# EAGLE board CT_schematic (EAGLE 7.6.0)

Size 100 x 80 mm. Coordinates in mm from the lower left corner, seen from the top.
Outline: 0,0 100,0 100,80 0,80 0,0
Copper layers (1*16): Top 0.035mm / dielectric 1.5mm / Bottom 0.035mm
Design rules "default": minimum track width 10mil, minimum drill 24mil, track to track 8mil, track to pad 8mil, pad to pad 8mil, via to via 8mil, smd to smd 8mil, copper to edge 40mil, drill to drill 8mil, minimum pad ring 10mil, minimum via ring 8mil, stop-mask expansion 4mil, vias tented up to drill 0mil, thermal gap 10mil

## Footprints (pad centres in the part's own frame; a part is rotated, then mirrored left to right if it is on the bottom)
C0603 = smd 0.8 x 0.8: 1 -0.762,0; 2 0.762,0
C0402 = smd 0.5 x 0.5: 1 -0.508,0; 2 0.508,0
C1210 = smd 1.2 x 2.5: 1 -1.524,0; 2 1.524,0
R0603 = smd 0.8 x 0.8: 1 -0.762,0; 2 0.762,0
C0805 = smd 1.2 x 1.3: 1 -1.016,0; 2 1.016,0
C1206 = smd 1.3 x 1.6: 1 -1.524,0; 2 1.524,0
EXV-9H = smd 3.505 x 1.676: 1 -2.857,0; 2 2.857,0
L0603 = smd 0.8 x 0.8: 1 -0.762,0; 2 0.762,0
DR1040 = smd 1.6 x 3.2: 1 -4.458,0; 2 4.458,0
PJ-037B_PACKAGE = drill 3.7 square: 1 12,0 | drill 3.2 square: 2 6,0
TFBGA216 = smd 0.4 x 0.4: A1 -5.6,5.6; A2 -4.8,5.6; A3 -4,5.6; A4 -3.2,5.6; A5 -2.4,5.6; A6 -1.6,5.6; A7 -0.8,5.6; A8 0,5.6; A9 0.8,5.6; A10 1.6,5.6; A11 2.4,5.6; A12 3.2,5.6; A13 4,5.6; A14 4.8,5.6; A15 5.6,5.6; B1 -5.6,4.8; B2 -4.8,4.8; B3 -4,4.8; B4 -3.2,4.8; B5 -2.4,4.8; B6 -1.6,4.8; B7 -0.8,4.8; B8 0,4.8; B9 0.8,4.8; B10 1.6,4.8; B11 2.4,4.8; B12 3.2,4.8; B13 4,4.8; B14 4.8,4.8; B15 5.6,4.8; C1 -5.6,4; C2 -4.8,4; C3 -4,4; C4 -3.2,4; C5 -2.4,4; C6 -1.6,4; C7 -0.8,4; C8 0,4; C9 0.8,4; C10 1.6,4; C11 2.4,4; C12 3.2,4; C13 4,4; C14 4.8,4; C15 5.6,4; D1 -5.6,3.2; D2 -4.8,3.2; D3 -4,3.2; D4 -3.2,3.2; D5 -2.4,3.2; D6 -1.6,3.2; D7 -0.8,3.2; D8 0,3.2; D9 0.8,3.2; D10 1.6,3.2; D11 2.4,3.2; D12 3.2,3.2; D13 4,3.2; D14 4.8,3.2; D15 5.6,3.2; E1 -5.6,2.4; E2 -4.8,2.4; E3 -4,2.4; E4 -3.2,2.4; E5 -2.4,2.4; E6 -1.6,2.4; E7 -0.8,2.4; E8 0,2.4; E9 0.8,2.4; E10 1.6,2.4; E11 2.4,2.4; E12 3.2,2.4; E13 4,2.4; E14 4.8,2.4; E15 5.6,2.4; F1 -5.6,1.6; F2 -4.8,1.6; F3 -4,1.6; F4 -3.2,1.6; F5 -2.4,1.6; F6 -1.6,1.6; F7 -0.8,1.6; F8 0,1.6; F9 0.8,1.6; F10 1.6,1.6; F11 2.4,1.6; F12 3.2,1.6; F13 4,1.6; F14 4.8,1.6; F15 5.6,1.6; G1 -5.6,0.8; G2 -4.8,0.8; G3 -4,0.8; G4 -3.2,0.8; G5 -2.4,0.8; G6 -1.6,0.8; G10 1.6,0.8; G11 2.4,0.8; G12 3.2,0.8; G13 4,0.8; G14 4.8,0.8; G15 5.6,0.8; H1 -5.6,0; H2 -4.8,0; H3 -4,0; H4 -3.2,0; H5 -2.4,0; H6 -1.6,0; H10 1.6,0; H11 2.4,0; H12 3.2,0; H13 4,0; H14 4.8,0; H15 5.6,0; J1 -5.6,-0.8; J2 -4.8,-0.8; J3 -4,-0.8; J4 -3.2,-0.8; J5 -2.4,-0.8; J6 -1.6,-0.8; J10 1.6,-0.8; J11 2.4,-0.8; J12 3.2,-0.8; J13 4,-0.8; J14 4.8,-0.8; J15 5.6,-0.8; K1 -5.6,-1.6; K2 -4.8,-1.6; K3 -4,-1.6; K4 -3.2,-1.6; K5 -2.4,-1.6; K6 -1.6,-1.6; K7 -0.8,-1.6; K8 0,-1.6; K9 0.8,-1.6; K10 1.6,-1.6; K11 2.4,-1.6; K12 3.2,-1.6; K13 4,-1.6; K14 4.8,-1.6; K15 5.6,-1.6; L1 -5.6,-2.4; L2 -4.8,-2.4; L3 -4,-2.4; L4 -3.2,-2.4; L5 -2.4,-2.4; L6 -1.6,-2.4; L7 -0.8,-2.4; L8 0,-2.4; L9 0.8,-2.4; L10 1.6,-2.4; L11 2.4,-2.4; L12 3.2,-2.4; L13 4,-2.4; L14 4.8,-2.4; L15 5.6,-2.4; M1 -5.6,-3.2; M2 -4.8,-3.2; M3 -4,-3.2; M4 -3.2,-3.2; M5 -2.4,-3.2; M6 -1.6,-3.2; M7 -0.8,-3.2; M8 0,-3.2; M9 0.8,-3.2; M10 1.6,-3.2; M11 2.4,-3.2; M12 3.2,-3.2; M13 4,-3.2; M14 4.8,-3.2; M15 5.6,-3.2; N1 -5.6,-4; N2 -4.8,-4; N3 -4,-4; N4 -3.2,-4; N5 -2.4,-4; N6 -1.6,-4; N7 -0.8,-4; N8 0,-4; N9 0.8,-4; N10 1.6,-4; N11 2.4,-4; N12 3.2,-4; N13 4,-4; N14 4.8,-4; N15 5.6,-4; P1 -5.6,-4.8; P2 -4.8,-4.8; P3 -4,-4.8; P4 -3.2,-4.8; P5 -2.4,-4.8; P6 -1.6,-4.8; P7 -0.8,-4.8; P8 0,-4.8; P9 0.8,-4.8; P10 1.6,-4.8; P11 2.4,-4.8; P12 3.2,-4.8; P13 4,-4.8; P14 4.8,-4.8; P15 5.6,-4.8; R1 -5.6,-5.6; R2 -4.8,-5.6; R3 -4,-5.6; R4 -3.2,-5.6; R5 -2.4,-5.6; R6 -1.6,-5.6; R7 -0.8,-5.6; R8 0,-5.6; R9 0.8,-5.6; R10 1.6,-5.6; R11 2.4,-5.6; R12 3.2,-5.6; R13 4,-5.6; R14 4.8,-5.6; R15 5.6,-5.6
LGA63S127P16X13_2050X1750X150 = smd 0.9 x 0.9: 1 -9.525,-8.05; 2 -8.255,-8.05; 3 -6.985,-8.05; 4 -5.715,-8.05; 5 -4.445,-8.05; 6 -3.175,-8.05; 7 -1.905,-8.05; 8 -0.635,-8.05; 9 0.635,-8.05; 10 1.905,-8.05; 11 3.175,-8.05; 12 4.445,-8.05; 13 5.715,-8.05; 14 6.985,-8.05; 15 8.255,-8.05; 16 9.525,-8.05; 17 9.525,-6.35; 18 9.525,-5.08; 19 9.525,-3.81; 20 9.525,-2.54; 21 9.525,-1.27; 22 9.525,0; 23 9.525,1.27; 24 9.525,2.54; 25 9.525,3.81; 26 9.525,5.08; 27 9.525,6.35; 28 9.525,8.05; 29 8.255,8.05; 30 6.985,8.05; 31 5.715,8.05; 32 4.445,8.05; 33 3.175,8.05; 34 1.905,8.05; 35 0.635,8.05; 36 -0.635,8.05; 37 -1.905,8.05; 38 -3.175,8.05; 39 -4.445,8.05; 40 -5.715,8.05; 41 -6.985,8.05; 42 -8.255,8.05; 43 -9.525,8.05; 44 -9.525,6.35; 45 -9.525,5.08; 46 -9.525,3.81; 47 -9.525,2.54; 48 -9.525,1.27; 49 -9.525,0; 50 -9.525,-1.27; 51 -9.525,-2.54; 52 -9.525,-3.81; 53 -9.525,-5.08; 54 -9.525,-6.35 | smd 2.2 x 2.2: 55 -4.5,-4.5; 56 -1.5,-4.5; 57 1.5,-4.5; 58 -4.5,-1.5; 59 -1.5,-1.5; 60 1.5,-1.5; 61 -4.5,1.5; 62 -1.5,1.5; 63 1.5,1.5
COAXIAL_C = smd 1 x 1: 1 0,-1.5; 2 0,1.5 | smd 1.05 x 2.2: 3 -1.475,0; 4 1.475,0
TST-110-05-T-D-RA = drill 1 pad 1.7 square: 1 0,0 | drill 1 pad 1.7: 2 0,2.54; 3 2.54,0; 4 2.54,2.54; 5 5.08,0; 6 5.08,2.54; 7 7.62,0; 8 7.62,2.54; 9 10.16,0; 10 10.16,2.54; 11 12.7,0; 12 12.7,2.54; 13 15.24,0; 14 15.24,2.54; 15 17.78,0; 16 17.78,2.54; 17 20.32,0; 18 20.32,2.54; 19 22.86,0; 20 22.86,2.54
LBGA-64 = smd 0.559 x 0.559: A1 -3.5,3.5; A2 -2.5,3.5; A3 -1.5,3.5; A4 -0.5,3.5; A5 0.5,3.5; A6 1.5,3.5; A7 2.5,3.5; A8 3.5,3.5; B1 -3.5,2.5; B2 -2.5,2.5; B3 -1.5,2.5; B4 -0.5,2.5; B5 0.5,2.5; B6 1.5,2.5; B7 2.5,2.5; B8 3.5,2.5; C1 -3.5,1.5; C2 -2.5,1.5; C3 -1.5,1.5; C4 -0.5,1.5; C5 0.5,1.5; C6 1.5,1.5; C7 2.5,1.5; C8 3.5,1.5; D1 -3.5,0.5; D2 -2.5,0.5; D3 -1.5,0.5; D4 -0.5,0.5; D5 0.5,0.5; D6 1.5,0.5; D7 2.5,0.5; D8 3.5,0.5; E1 -3.5,-0.5; E2 -2.5,-0.5; E3 -1.5,-0.5; E4 -0.5,-0.5; E5 0.5,-0.5; E6 1.5,-0.5; E7 2.5,-0.5; E8 3.5,-0.5; F1 -3.5,-1.5; F2 -2.5,-1.5; F3 -1.5,-1.5; F4 -0.5,-1.5; F5 0.5,-1.5; F6 1.5,-1.5; F7 2.5,-1.5; F8 3.5,-1.5; G1 -3.5,-2.5; G2 -2.5,-2.5; G3 -1.5,-2.5; G4 -0.5,-2.5; G5 0.5,-2.5; G6 1.5,-2.5; G7 2.5,-2.5; G8 3.5,-2.5; H1 -3.5,-3.5; H2 -2.5,-3.5; H3 -1.5,-3.5; H4 -0.5,-3.5; H5 0.5,-3.5; H6 1.5,-3.5; H7 2.5,-3.5; H8 3.5,-3.5
QFN-32 = smd 0.6 x 0.3: 1 -2.3,1.75; 2 -2.3,1.25; 3 -2.3,0.75; 4 -2.3,0.25; 5 -2.3,-0.25; 6 -2.3,-0.75; 7 -2.3,-1.25; 8 -2.3,-1.75; 17 2.3,-1.75; 18 2.3,-1.25; 19 2.3,-0.75; 20 2.3,-0.25; 21 2.3,0.25; 22 2.3,0.75; 23 2.3,1.25; 24 2.3,1.75 | smd 0.3 x 0.6: 9 -1.75,-2.3; 10 -1.25,-2.3; 11 -0.75,-2.3; 12 -0.25,-2.3; 13 0.25,-2.3; 14 0.75,-2.3; 15 1.25,-2.3; 16 1.75,-2.3; 25 1.75,2.3; 26 1.25,2.3; 27 0.75,2.3; 28 0.25,2.3; 29 -0.25,2.3; 30 -0.75,2.3; 31 -1.25,2.3; 32 -1.75,2.3 | smd 3.2 x 3.2: EXP 0,0
SJ-43515TS-SMT-TR = smd 2.2 x 3: 1 0.6,-7.4; 4 3.4,-7.4 | smd 3 x 3: 2 12.8,-7.4; 5 17,-3 | smd 2 x 3: 3 5.3,0; 6 2.5,0 | drill 1.8: P$7 4.5,-3.69; P$8 11.54,-3.69
WM-64PC = drill 0.6 pad 1: 1 -1,0.95; 2 -1,-0.95
QFN-24 = smd 0.7 x 0.305: 1 -1.815,1.25; 2 -1.815,0.75; 3 -1.815,0.25; 4 -1.815,-0.25; 5 -1.815,-0.73; 6 -1.815,-1.25; 13 1.815,-1.25; 14 1.815,-0.75; 15 1.815,-0.25; 16 1.815,0.25; 17 1.815,0.75; 18 1.815,1.25 | smd 0.305 x 0.7: 7 -1.25,-1.815; 8 -0.75,-1.815; 9 -0.25,-1.815; 10 0.25,-1.815; 11 0.75,-1.815; 12 1.25,-1.815; 19 1.25,1.815; 20 0.75,1.815; 21 0.25,1.815; 22 -0.25,1.815; 23 -0.75,1.815; 24 -1.25,1.815 | smd 2.591 x 2.591: 25 0,0
FCI_10118193-0001LF = smd 0.4 x 1.35: 1 -1.3,2.675; 2 -0.65,2.675; 3 0,2.675; 4 0.65,2.675; 5 1.3,2.675 | smd 1.6 x 1.4: 6 -3.2,2.45; 7 3.2,2.45 | smd 1.9 x 1.9: 8 -1.2,0; 9 1.2,0 | hole 0.5: -3.3,0; 3.3,0
SOT143B = smd 1 x 0.7: 1 -0.75,-1 | smd 0.6 x 0.7: 2 0.95,-1; 3 0.95,1; 4 -0.95,1
ABLS-25.000MHZ-B2F-T = smd 5.6 x 2.8: 1 -3.81,0; 2 5.69,0
ASEK = smd 1.4 x 1: 1 -1.1,-0.8; 2 1.1,-0.8; 3 1.1,0.8; 4 -1.1,0.8
ASFL1 = smd 1.7 x 1.5: 1 -1.27,-1.1; 2 1.27,-1.1; 3 1.27,1.1; 4 -1.27,1.1
WSON-8 = smd 0.3 x 0.6: 1 -0.75,0; 2 0.05,0; 3 0.85,0; 4 1.65,0; 5 1.65,3.8; 6 0.85,3.8; 7 0.05,3.8; 8 -0.75,3.8 | smd 3 x 2.6: PAD 0.45,1.9
HTSSOP14 = smd 1.676 x 0.356: 1 -2.8,1.95; 2 -2.8,1.3; 3 -2.8,0.65; 4 -2.8,0; 5 -2.8,-0.65; 6 -2.8,-1.3; 7 -2.8,-1.95; 8 2.8,-1.95; 9 2.8,-1.3; 10 2.8,-0.65; 11 2.8,0; 12 2.8,0.65; 13 2.8,1.3; 14 2.8,1.95 | smd 3 x 5: 15 0,0 | drill 0.4 pad 0.45: P$1 -0.75,1.5; P$2 0.75,1.5; P$3 -0.75,0; P$4 0.8,0; P$5 -0.75,-1.5; P$6 0.9,-1.5
SON-6 = smd 0.55 x 0.3: 1 -0.355,0.5 | smd 0.52 x 0.3: 2 -0.37,0; 3 -0.37,-0.5; 4 0.37,-0.5; 5 0.37,0; 6 0.37,0.5
SW_4-1437565-2 = smd 1.4 x 2.1: 1 -2.23,4.55; 2 -2.23,-4.55; 3 2.23,4.55; 4 2.23,-4.55
LGM67K-G1J2-24-Z = smd 0.8 x 1.4: A -2,0; C 0,0
NC7SZ125M5X = smd 1.3 x 0.7: 1 -1.3,0.95; 2 -1.3,0; 3 -1.3,-0.95; 4 1.3,-0.95; 5 1.3,0.95

## Placement (x,y rotation side)
C1  1e-06  [C0603]  -22.86,88.9 0 top  (outside the outline)
C2  1e-07  [C0603]  -26.67,88.9 0 top  (outside the outline)
C3  1e-07  [C0603]  -30.48,88.9 0 top  (outside the outline)
C4  1e-07  [C0603]  -34.29,88.9 0 top  (outside the outline)
C5  1e-07  [C0603]  -38.1,88.9 0 top  (outside the outline)
C6  1e-07  [C0603]  -41.91,88.9 0 top  (outside the outline)
C7  1e-07  [C0603]  -45.72,88.9 0 top  (outside the outline)
C8  1e-07  [C0603]  -49.53,88.9 0 top  (outside the outline)
C9  1e-07  [C0603]  -53.34,88.9 0 top  (outside the outline)
C10  1e-07  [C0603]  -57.15,88.9 0 top  (outside the outline)
C11  1e-07  [C0603]  -60.96,88.9 0 top  (outside the outline)
C12  1e-07  [C0603]  -64.77,88.9 0 top  (outside the outline)
C13  1e-07  [C0603]  -68.58,88.9 0 top  (outside the outline)
C14  1e-07  [C0603]  -72.39,88.9 0 top  (outside the outline)
C15  1e-07  [C0603]  -76.2,88.9 0 top  (outside the outline)
C16  1e-07  [C0603]  -80.01,88.9 0 top  (outside the outline)
C17  1e-07  [C0603]  -83.82,88.9 0 top  (outside the outline)
C18  1e-07  [C0603]  -87.63,88.9 0 top  (outside the outline)
C19  1e-07  [C0603]  -91.44,88.9 0 top  (outside the outline)
C20  1e-07  [C0603]  -95.25,88.9 0 top  (outside the outline)
C21  1e-07  [C0603]  -15.24,93.98 0 top  (outside the outline)
C22  4.7e-06  [C0603]  -90.17,83.82 0 top  (outside the outline)
C23  1e-07  [C0603]  -19.05,93.98 0 top  (outside the outline)
C24  1e-08  [C0603]  -22.86,93.98 0 top  (outside the outline)
C25  1e-06  [C0603]  -26.67,93.98 0 top  (outside the outline)
C26  1e-07  [C0603]  -30.48,93.98 0 top  (outside the outline)
C27  2.2e-06  [C0603]  -93.98,83.82 0 top  (outside the outline)
C28  2.2e-06  [C0603]  -15.24,88.9 0 top  (outside the outline)
C29  1e-11  [C0402]  -50.8,99.06 0 top  (outside the outline)
C30  1e-11  [C0402]  -54.61,99.06 0 top  (outside the outline)
C31  1e-12  [C0402]  -58.42,99.06 0 top  (outside the outline)
C32  2.2e-05  [C1210]  -66.04,69.85 0 top  (outside the outline)
C33  1e-07  [C0402]  -62.23,99.06 0 top  (outside the outline)
C34  1e-07  [C0402]  -66.04,99.06 0 top  (outside the outline)
C35  1e-07  [C0402]  -69.85,99.06 0 top  (outside the outline)
C36  1e-07  [C0402]  -73.66,99.06 0 top  (outside the outline)
C37  1e-08  [C0402]  -77.47,99.06 0 top  (outside the outline)
C38  1e-08  [C0402]  -81.28,99.06 0 top  (outside the outline)
C39  1e-06  [C0603]  -34.29,93.98 0 top  (outside the outline)
C40  1e-06  [C0603]  -38.1,93.98 0 top  (outside the outline)
C41  1e-06  [C0603]  -41.91,93.98 0 top  (outside the outline)
C42  1e-06  [C0603]  -45.72,93.98 0 top  (outside the outline)
C43  1e-06  [C0603]  -49.53,93.98 0 top  (outside the outline)
C44  1e-06  [C0603]  -53.34,93.98 0 top  (outside the outline)
C45  1e-06  [C0603]  -57.15,93.98 0 top  (outside the outline)
C46  1e-07  [C0402]  -85.09,99.06 0 top  (outside the outline)
C47  1e-07  [C0402]  -88.9,99.06 0 top  (outside the outline)
C48  1e-07  [C0402]  -92.71,99.06 0 top  (outside the outline)
C49  1e-07  [C0402]  -96.52,99.06 0 top  (outside the outline)
C50  1e-06  [C0603]  -60.96,93.98 0 top  (outside the outline)
C51  1e-08  [C0402]  -15.24,104.14 0 top  (outside the outline)
C52  2.2e-06  [C0603]  -19.05,88.9 0 top  (outside the outline)
C53  1e-08  [C0402]  -19.05,104.14 0 top  (outside the outline)
C54  1e-08  [C0402]  -22.86,104.14 0 top  (outside the outline)
C55  1e-06  [C0603]  -64.77,93.98 0 top  (outside the outline)
C56  1e-08  [C0402]  -26.67,104.14 0 top  (outside the outline)
C57  1e-08  [C0402]  -30.48,104.14 0 top  (outside the outline)
C58  1e-08  [C0402]  -34.29,104.14 0 top  (outside the outline)
C59  8e-07  [R0603]  -68.58,93.98 0 top  (outside the outline)
C60  1e-05  [C0805]  -46.99,77.47 0 top  (outside the outline)
C61  1e-06  [C0603]  -72.39,93.98 0 top  (outside the outline)
C62  3.3e-09  [C0402]  -43.18,99.06 0 top  (outside the outline)
C63  1e-07  [C0402]  -38.1,104.14 0 top  (outside the outline)
C64  2.2e-05  [C1210]  -72.39,69.85 0 top  (outside the outline)
C65  2.2e-05  [C1210]  -78.74,69.85 0 top  (outside the outline)
C66  1e-05  [C1206]  -85.09,69.85 0 top  (outside the outline)
C67  1e-05  [C1206]  -91.44,69.85 0 top  (outside the outline)
C68  1e-07  [C0402]  -41.91,104.14 0 top  (outside the outline)
C69  0.0001  [EXV-9H]  -74.93,62.23 0 top  (outside the outline)
C70  0.0001  [EXV-9H]  -86.36,62.23 0 top  (outside the outline)
C71  1e-08  [C0402]  -45.72,104.14 0 top  (outside the outline)
C72  1e-08  [C0402]  -49.53,104.14 0 top  (outside the outline)
C73  1e-08  [C0402]  -53.34,104.14 0 top  (outside the outline)
C74  1e-08  [C0402]  -57.15,104.14 0 top  (outside the outline)
C75  1e-08  [C0402]  -60.96,104.14 0 top  (outside the outline)
F1  240.0  [L0603]  -76.2,93.98 0 top  (outside the outline)
I1  3.6e-09  [C0402]  -46.99,99.06 0 top  (outside the outline)
I2  5.2e-06  [DR1040]  -38.1,41.91 0 top  (outside the outline)
J1  PJ-037B  [PJ-037B_PACKAGE]  -83.82,29.21 0 top  (outside the outline)
R2  1000.0  [R0603]  -80.01,93.98 0 top  (outside the outline)
R7  4700.0  [R0603]  -83.82,93.98 0 top  (outside the outline)
R8  4700.0  [R0603]  -87.63,93.98 0 top  (outside the outline)
R9  4700.0  [R0603]  -91.44,93.98 0 top  (outside the outline)
R10  4700.0  [R0603]  -95.25,93.98 0 top  (outside the outline)
R11  2200.0  [R0603]  -15.24,99.06 0 top  (outside the outline)
R13  2200.0  [R0603]  -19.05,99.06 0 top  (outside the outline)
R15  10000.0  [R0603]  -86.36,77.47 0 top  (outside the outline)
R16  10000.0  [R0603]  -91.44,77.47 0 top  (outside the outline)
R17  10000.0  [R0603]  -96.52,77.47 0 top  (outside the outline)
R18  100000.0  [R0603]  -60.96,77.47 0 top  (outside the outline)
R19  2700.0  [R0603]  -22.86,99.06 0 top  (outside the outline)
R20  10000.0  [R0603]  -15.24,83.82 0 top  (outside the outline)
R21  10000.0  [R0603]  -20.32,83.82 0 top  (outside the outline)
R22  10000.0  [R0603]  -25.4,83.82 0 top  (outside the outline)
R23  10000.0  [R0603]  -30.48,83.82 0 top  (outside the outline)
R24  10000.0  [R0603]  -35.56,83.82 0 top  (outside the outline)
R25  10000.0  [R0603]  -40.64,83.82 0 top  (outside the outline)
R26  10000.0  [R0603]  -45.72,83.82 0 top  (outside the outline)
R27  10000.0  [R0603]  -50.8,83.82 0 top  (outside the outline)
R28  10000.0  [R0603]  -55.88,83.82 0 top  (outside the outline)
R29  10000.0  [R0603]  -60.96,83.82 0 top  (outside the outline)
R30  10000.0  [R0603]  -66.04,83.82 0 top  (outside the outline)
R31  1270.0  [R0603]  -26.67,99.06 0 top  (outside the outline)
R32  1270.0  [R0603]  -30.48,99.06 0 top  (outside the outline)
R33  8060.0  [R0603]  -34.29,99.06 0 top  (outside the outline)
R34  100000.0  [R0603]  -66.04,77.47 0 top  (outside the outline)
R35  36000.0  [R0603]  -71.12,83.82 0 top  (outside the outline)
R36  100000.0  [R0603]  -71.12,77.47 0 top  (outside the outline)
R37  71007.101651032  [R0603]  -55.88,77.47 0 top  (outside the outline)
R38  22000.0  [R0603]  -76.2,83.82 0 top  (outside the outline)
R39  10000.0  [R0603]  -81.28,83.82 0 top  (outside the outline)
R40  10000.0  [R0603]  -86.36,83.82 0 top  (outside the outline)
R41  9100.0  [R0603]  -38.1,99.06 0 top  (outside the outline)
R42  680000.0  [R0603]  -76.2,77.47 0 top  (outside the outline)
R43  120000.0  [R0603]  -81.28,77.47 0 top  (outside the outline)
U1  STM32F779NIH6  [TFBGA216]  -49.53,8.89 0 top  (outside the outline)
U2  CC3200MODR1M2AMOBT  [LGA63S127P16X13_2050X1750X150]  -25.4,11.43 0 top  (outside the outline)
U3  73412-0114  [COAXIAL_C]  -67.31,53.34 0 top  (outside the outline)
U4  TST-110-05-T-D-RA  [TST-110-05-T-D-RA]  -46.99,60.96 0 top  (outside the outline)
U5  MT28EW128ABA1HPC-0SIT  [LBGA-64]  -62.23,7.62 0 top  (outside the outline)
U6  SGTL5000XNAA3  [QFN-32]  -64.77,41.91 0 top  (outside the outline)
U7  SJ-43515TS-SMT-TR  [SJ-43515TS-SMT-TR]  -96.52,10.16 0 top  (outside the outline)
U8  SJ-43515TS-SMT-TR  [SJ-43515TS-SMT-TR]  -39.37,31.75 0 top  (outside the outline)
U9  SJ-43515TS-SMT-TR  [SJ-43515TS-SMT-TR]  -67.31,31.75 0 top  (outside the outline)
U10  WM-64PCT  [WM-64PC]  -50.8,41.91 0 top  (outside the outline)
U11  USB3317C-CP-TR  [QFN-24]  -58.42,71.12 0 top  (outside the outline)
U12  10118193-0001LF  [FCI_10118193-0001LF]  -53.34,53.34 0 top  (outside the outline)
U13  prtr5v0u2ax  [SOT143B]  -73.66,104.14 0 top  (outside the outline)
U14  ABLS-25.000MHZ-B2F-T  [ABLS-25.000MHZ-B2F-T]  -26.67,71.12 0 top  (outside the outline)
U15  ASEK-32.768KHz-ECST  [ASEK]  -66.04,62.23 0 top  (outside the outline)
U16  ASFL-24.57MHZ-NCS  [ASFL1]  -27.94,53.34 0 top  (outside the outline)
U17  ASFL1-26MHZ-NCS  [ASFL1]  -44.45,53.34 0 top  (outside the outline)
U18  LP2951ACSDX/NOPB  [WSON-8]  -85.09,39.37 0 top  (outside the outline)
U19  tps54325PWP  [HTSSOP14]  -38.1,69.85 0 top  (outside the outline)
U20  TPS3895ADRYR  [SON-6]  -77.47,102.87 0 top  (outside the outline)
U21  4-1437565-2  [SW_4-1437565-2]  -27.94,43.18 0 top  (outside the outline)
U22  Q65110A2395  [LGM67K-G1J2-24-Z]  -46.99,71.12 0 top  (outside the outline)
U23  nc7sz125m5x  [NC7SZ125M5X]  -15.24,77.47 0 top  (outside the outline)
U24  nc7sz125m5x  [NC7SZ125M5X]  -21.59,77.47 0 top  (outside the outline)
U25  nc7sz125m5x  [NC7SZ125M5X]  -27.94,77.47 0 top  (outside the outline)
U26  nc7sz125m5x  [NC7SZ125M5X]  -34.29,77.47 0 top  (outside the outline)
U27  nc7sz125m5x  [NC7SZ125M5X]  -40.64,77.47 0 top  (outside the outline)

## Library data of the parts
C1-C75 F1 I1 I2 J1 R2 R7-R11 R13 R15-R43 U1-U27 = circuit_tree

## Nets
CLK_CRYSTAL_U1_G1: C29.1 U1.G1 U14.1
CLK_CRYSTAL_U1_H1: C30.1 U1.H1 U14.2
CLK_U1_E1: U1.E1 U15.3
CLK_U6_21: U6.21 U16.3
CLK_U11_23: U11.23 U17.3
GND: C1.2 C2.2 C3.2 C4.2 C5.2 C6.2 C7.2 C8.2 C9.2 C10.2 C11.2 C12.2 C13.2 C14.2 C15.2 C16.2 C17.2 C18.2 C19.2 C20.2 C21.2 C22.2 C23.2 C24.2 C25.2 C26.2 C27.2 C28.2 C29.2 C30.2 C31.2 C32.2 C33.2 C34.2 C35.2 C36.2 C37.2 C38.2 C46.2 C47.2 C48.2 C49.2 C50.2 C51.2 C52.2 C53.2 C54.2 C55.2 C56.2 C57.2 C58.2 C59.2 C60.2 C61.2 C62.2 C64.2 C65.2 C66.2 C67.2 C68.2 C69.2 C70.2 C71.2 C72.2 C73.2 C74.2 C75.2 J1.2 R2.2 R15.2 R17.2 R18.2 R19.2 R25.2 R32.2 R33.2 R36.2 R38.2 R41.2 R43.2 U1.F2 U1.F6 U1.F7 U1.F8 U1.F9 U1.F10 U1.G6 U1.G10 U1.G12 U1.H6 U1.H10 U1.J6 U1.J10 U1.K6 U1.K7 U1.K8 U1.K9 U1.K10 U1.L6 U1.M1 U1.N1 U2.1 U2.2 U2.16 U2.27 U2.28 U2.30 U2.32 U2.38 U2.43 U2.55 U2.56 U2.57 U2.58 U2.59 U2.60 U2.61 U2.62 U2.63 U3.1 U3.2 U3.3 U3.4 U4.4 U4.6 U4.8 U4.10 U4.12 U4.14 U4.16 U4.18 U4.20 U5.E8 U5.H2 U5.H7 U6.1 U6.3 U6.7 U6.EXP U8.1 U9.1 U10.2 U11.25 U12.5 U12.6 U12.7 U12.8 U12.9 U13.1 U15.2 U16.2 U17.2 U18.3 U18.4 U18.PAD U19.5 U19.8 U19.9 U19.15 U20.2 U22.C U23.2 U23.3 U24.1 U24.3 U25.1 U25.3 U26.1 U26.3 U27.1 U27.3
NET_U1_A7: R11.1 U1.A7 U2.3
NET_U1_B4: R13.1 U1.B4 U2.4
NET_U1_E5: R16.1 U1.E5
NET_U1_E6: R15.1 U1.E6
NET_U1_E11: C28.1 U1.E11
NET_U1_G13: U1.G13
NET_U1_J1: R9.1 U1.J1 U26.4
NET_U1_K12: U1.K12
NET_U1_L5: R17.1 U1.L5
NET_U1_L11: C27.1 U1.L11
NET_U1_R1: C24.1 C25.1 F1.1 U1.P1 U1.R1
NET_U1_R14: U22.A
NET_U1_R15: U21.3 U21.4
NET_U2_21: R18.1 U2.21
NET_U2_23: R19.1 U2.23
NET_U2_35: R8.1 U2.35 U25.4
NET_U3_1: C31.1 I1.1 U3.1
NET_U3_31: I1.2
NET_U4_19: R25.1 U4.19
NET_U5_B4: R29.1 U5.B4
NET_U5_B5: R7.1 U5.B5 U24.4
NET_U6_10: C49.1 U6.10
NET_U6_29: R31.1 U6.29
NET_U6_31: R32.1 U6.31
NET_U7_1: U6.4 U7.1
NET_U7_2: U6.2 U7.2
NET_U7_5: U6.6 U7.5
NET_U8_2: C40.1 U8.2
NET_U8_5: C39.1 U8.5
NET_U8_11: C40.2
NET_U8_12: C39.2
NET_U9_2: C42.1 C43.1 U9.2
NET_U9_5: C41.1 U9.5
NET_U9_13: C42.2 C43.2
NET_U9_14: C41.2
NET_U10_1: C44.1 C45.1 C50.1 U6.16 U10.1
NET_U10_15: C44.2 C45.2
NET_U11_4: C52.1 U11.4
NET_U11_22: R10.1 U11.22 U27.4
NET_U11_24: R33.1 U11.24
NET_U12_1: C55.1 U11.2 U12.1 U13.4
NET_U12_2: U11.5 U12.2 U13.3
NET_U12_3: U11.6 U12.3 U13.2
NET_U18_5: R34.1 U18.5
NET_U18_7: R35.2 R36.1 U18.7
NET_U19_2: R37.2 R38.1 U19.2
NET_U19_3: C61.1 U19.3
NET_U19_4: C62.1 U19.4
NET_U19_10: C63.1 I2.1 U19.10 U19.11
NET_U19_12: C63.2 U19.12
NET_U20_1: R40.1 R41.1 U20.1
NET_U20_3: R42.2 R43.1 U20.3
NET_U20_4: R39.1 U20.4 U23.4 U24.2 U25.2 U26.2 U27.2
NET_U21_1: R2.1 U21.1 U21.2
PROC_FMC_A0: U1.D2 U5.E2
PROC_FMC_A1: U1.E2 U5.D2
PROC_FMC_A2: U1.G2 U5.C2
PROC_FMC_A3: U1.H2 U5.A2
PROC_FMC_A4: U1.J2 U5.B2
PROC_FMC_A5: U1.K3 U5.D3
PROC_FMC_A6: U1.M6 U5.C3
PROC_FMC_A7: U1.N6 U5.A3
PROC_FMC_A8: U1.P6 U5.B6
PROC_FMC_A9: U1.M8 U5.A6
PROC_FMC_A10: U1.N7 U5.C6
PROC_FMC_A11: U1.M7 U5.D6
PROC_FMC_A12: U1.M13 U5.B7
PROC_FMC_A13: U1.M12 U5.A7
PROC_FMC_A14: U1.N12 U5.C7
PROC_FMC_A15: U1.N11 U5.D7
PROC_FMC_A16: U1.N10 U5.E7
PROC_FMC_A17: U1.M10 U5.B3
PROC_FMC_A18: U1.M11 U5.C4
PROC_FMC_A19: U1.A2 U5.D5
PROC_FMC_A20: U1.A1 U5.D4
PROC_FMC_A21: U1.B1 U5.C5
PROC_FMC_A22: U1.B2 U5.B8
PROC_FMC_D0: U1.L12 U5.E3
PROC_FMC_D1: U1.K13 U5.H3
PROC_FMC_D2: U1.B12 U5.E4
PROC_FMC_D3: U1.C12 U5.H4
PROC_FMC_D4: U1.R8 U5.H5
PROC_FMC_D5: U1.N9 U5.E5
PROC_FMC_D6: U1.P9 U5.H6
PROC_FMC_D7: U1.R9 U5.E6
PROC_FMC_D8: U1.P10 U5.F3
PROC_FMC_D9: U1.R10 U5.G3
PROC_FMC_D10: U1.R12 U5.F4
PROC_FMC_D11: U1.P11 U5.G4
PROC_FMC_D12: U1.R11 U5.F5
PROC_FMC_D13: U1.L15 U5.G6
PROC_FMC_D14: U1.L14 U5.F6
PROC_FMC_D15: U1.K15 U5.G7
PROC_FMC_NBL0: R30.1 U1.A6 U5.F7
PROC_FMC_NE2: R26.1 U1.D9 U5.F2
PROC_FMC_NOE: R27.1 U1.D11 U5.G2
PROC_FMC_NWAIT: U1.B11 U5.A4
PROC_FMC_NWE: R28.1 U1.C10 U5.A5
PROC_I2S1_CK: U1.B8 U6.24
PROC_I2S1_SD: U1.A11 U6.26
PROC_I2S1_WS: U1.C8 U6.23
PROC_SYS_JTCK_SWCLK: R23.1 U1.A14 U4.9
PROC_SYS_JTDI: R21.1 U1.A13 U4.5
PROC_SYS_JTDO_SWO: U1.A10 U4.13
PROC_SYS_JTMS_SWDIO: R22.1 U1.A15 U4.7
PROC_SYS_JTRST: R20.1 U1.A9 U4.3
PROC_USB_OTG_HS_ULPI_CK: U1.P4 U11.12
PROC_USB_OTG_HS_ULPI_D0: U1.R2 U11.16
PROC_USB_OTG_HS_ULPI_D1: U1.R5 U11.15
PROC_USB_OTG_HS_ULPI_D2: U1.R4 U11.14
PROC_USB_OTG_HS_ULPI_D3: U1.P12 U11.13
PROC_USB_OTG_HS_ULPI_D4: U1.R13 U11.11
PROC_USB_OTG_HS_ULPI_D5: U1.L13 U11.10
PROC_USB_OTG_HS_ULPI_D6: U1.K14 U11.9
PROC_USB_OTG_HS_ULPI_D7: U1.A8 U11.8
PROC_USB_OTG_HS_ULPI_DIR: U1.F3 U11.19
PROC_USB_OTG_HS_ULPI_NXT: U1.H4 U11.18
PROC_USB_OTG_HS_ULPI_STP: U1.M2 U11.20
RST_OUT_U4_SRESET_B: R24.1 U4.15 U23.1
VCC_S1_12V5: C59.1 C66.1 C67.1 C69.1 C70.1 J1.1 U18.8 U19.7 U19.13 U19.14
VCC_TIER1_1V8: C46.1 C47.1 C54.1 C60.1 C71.1 C72.1 C73.1 C74.1 C75.1 R34.2 R35.1 U6.5 U6.30 U11.21 U18.1 U23.5 U24.5 U25.5 U26.5 U27.5
VCC_TIER1_3V3: C1.1 C2.1 C3.1 C4.1 C5.1 C6.1 C7.1 C8.1 C9.1 C10.1 C11.1 C12.1 C13.1 C14.1 C15.1 C16.1 C17.1 C18.1 C19.1 C20.1 C21.1 C22.1 C23.1 C26.1 C32.1 C33.1 C34.1 C35.1 C36.1 C37.1 C38.1 C48.1 C51.1 C53.1 C56.1 C57.1 C58.1 C64.1 C65.1 C68.1 F1.2 I2.2 R7.2 R8.2 R9.2 R10.2 R11.2 R13.2 R16.2 R20.2 R21.2 R22.2 R23.2 R24.2 R26.2 R27.2 R28.2 R29.2 R30.2 R31.2 R37.1 R39.2 R40.2 R42.1 U1.C1 U1.E7 U1.E8 U1.E9 U1.E10 U1.F4 U1.F5 U1.F11 U1.G5 U1.G11 U1.H5 U1.H11 U1.J5 U1.J11 U1.K5 U1.K11 U1.L7 U1.L8 U1.L9 U1.L10 U2.36 U2.37 U2.40 U4.1 U4.2 U5.D8 U5.F1 U5.G5 U6.20 U11.3 U11.17 U15.4 U16.4 U17.4 U19.1 U20.6

## Tracks (layer width: path | path; a pad name or v marks a point on that pad's centre or on a via)
CLK_CRYSTAL_U1_G1  (2 unrouted)
CLK_CRYSTAL_U1_H1  (2 unrouted)
CLK_U1_E1  (1 unrouted)
CLK_U6_21  (1 unrouted)
CLK_U11_23  (1 unrouted)
GND  (170 unrouted)
NET_U1_A7  (2 unrouted)
NET_U1_B4  (2 unrouted)
NET_U1_E5  (1 unrouted)
NET_U1_E6  (1 unrouted)
NET_U1_E11  (1 unrouted)
NET_U1_J1  (2 unrouted)
NET_U1_L5  (1 unrouted)
NET_U1_L11  (1 unrouted)
NET_U1_R1  (4 unrouted)
NET_U1_R15  (1 unrouted)
NET_U2_21  (1 unrouted)
NET_U2_23  (1 unrouted)
NET_U2_35  (2 unrouted)
NET_U3_1  (2 unrouted)
NET_U4_19  (1 unrouted)
NET_U5_B4  (1 unrouted)
NET_U5_B5  (2 unrouted)
NET_U6_10  (1 unrouted)
NET_U6_29  (1 unrouted)
NET_U6_31  (1 unrouted)
NET_U7_1  (1 unrouted)
NET_U7_2  (1 unrouted)
NET_U7_5  (1 unrouted)
NET_U8_2  (1 unrouted)
NET_U8_5  (1 unrouted)
NET_U9_2  (2 unrouted)
NET_U9_5  (1 unrouted)
NET_U9_13  (1 unrouted)
NET_U10_1  (4 unrouted)
NET_U10_15  (1 unrouted)
NET_U11_4  (1 unrouted)
NET_U11_22  (2 unrouted)
NET_U11_24  (1 unrouted)
NET_U12_1  (3 unrouted)
NET_U12_2  (2 unrouted)
NET_U12_3  (2 unrouted)
NET_U18_5  (1 unrouted)
NET_U18_7  (2 unrouted)
NET_U19_2  (2 unrouted)
NET_U19_3  (1 unrouted)
NET_U19_4  (1 unrouted)
NET_U19_10  (3 unrouted)
NET_U19_12  (1 unrouted)
NET_U20_1  (2 unrouted)
NET_U20_3  (2 unrouted)
NET_U20_4  (6 unrouted)
NET_U21_1  (2 unrouted)
PROC_FMC_A0  (1 unrouted)
PROC_FMC_A1  (1 unrouted)
PROC_FMC_A2  (1 unrouted)
PROC_FMC_A3  (1 unrouted)
PROC_FMC_A4  (1 unrouted)
PROC_FMC_A5  (1 unrouted)
PROC_FMC_A6  (1 unrouted)
PROC_FMC_A7  (1 unrouted)
PROC_FMC_A8  (1 unrouted)
PROC_FMC_A9  (1 unrouted)
PROC_FMC_A10  (1 unrouted)
PROC_FMC_A11  (1 unrouted)
PROC_FMC_A12  (1 unrouted)
PROC_FMC_A13  (1 unrouted)
PROC_FMC_A14  (1 unrouted)
PROC_FMC_A15  (1 unrouted)
PROC_FMC_A16  (1 unrouted)
PROC_FMC_A17  (1 unrouted)
PROC_FMC_A18  (1 unrouted)
PROC_FMC_A19  (1 unrouted)
PROC_FMC_A20  (1 unrouted)
PROC_FMC_A21  (1 unrouted)
PROC_FMC_A22  (1 unrouted)
PROC_FMC_D0  (1 unrouted)
PROC_FMC_D1  (1 unrouted)
PROC_FMC_D2  (1 unrouted)
PROC_FMC_D3  (1 unrouted)
PROC_FMC_D4  (1 unrouted)
PROC_FMC_D5  (1 unrouted)
PROC_FMC_D6  (1 unrouted)
PROC_FMC_D7  (1 unrouted)
PROC_FMC_D8  (1 unrouted)
PROC_FMC_D9  (1 unrouted)
PROC_FMC_D10  (1 unrouted)
PROC_FMC_D11  (1 unrouted)
PROC_FMC_D12  (1 unrouted)
PROC_FMC_D13  (1 unrouted)
PROC_FMC_D14  (1 unrouted)
PROC_FMC_D15  (1 unrouted)
PROC_FMC_NBL0  (2 unrouted)
PROC_FMC_NE2  (2 unrouted)
PROC_FMC_NOE  (2 unrouted)
PROC_FMC_NWAIT  (1 unrouted)
PROC_FMC_NWE  (2 unrouted)
PROC_I2S1_CK  (1 unrouted)
PROC_I2S1_SD  (1 unrouted)
PROC_I2S1_WS  (1 unrouted)
PROC_SYS_JTCK_SWCLK  (2 unrouted)
PROC_SYS_JTDI  (2 unrouted)
PROC_SYS_JTDO_SWO  (1 unrouted)
PROC_SYS_JTMS_SWDIO  (2 unrouted)
PROC_SYS_JTRST  (2 unrouted)
PROC_USB_OTG_HS_ULPI_CK  (1 unrouted)
PROC_USB_OTG_HS_ULPI_D0  (1 unrouted)
PROC_USB_OTG_HS_ULPI_D1  (1 unrouted)
PROC_USB_OTG_HS_ULPI_D2  (1 unrouted)
PROC_USB_OTG_HS_ULPI_D3  (1 unrouted)
PROC_USB_OTG_HS_ULPI_D4  (1 unrouted)
PROC_USB_OTG_HS_ULPI_D5  (1 unrouted)
PROC_USB_OTG_HS_ULPI_D6  (1 unrouted)
PROC_USB_OTG_HS_ULPI_D7  (1 unrouted)
PROC_USB_OTG_HS_ULPI_DIR  (1 unrouted)
PROC_USB_OTG_HS_ULPI_NXT  (1 unrouted)
PROC_USB_OTG_HS_ULPI_STP  (1 unrouted)
RST_OUT_U4_SRESET_B  (2 unrouted)
VCC_S1_12V5  (9 unrouted)
VCC_TIER1_1V8  (19 unrouted)
VCC_TIER1_3V3  (99 unrouted)